# EAGLE board 13336_esp32-thing-panel.v10 (EAGLE 7.5.0), part 1 of 10
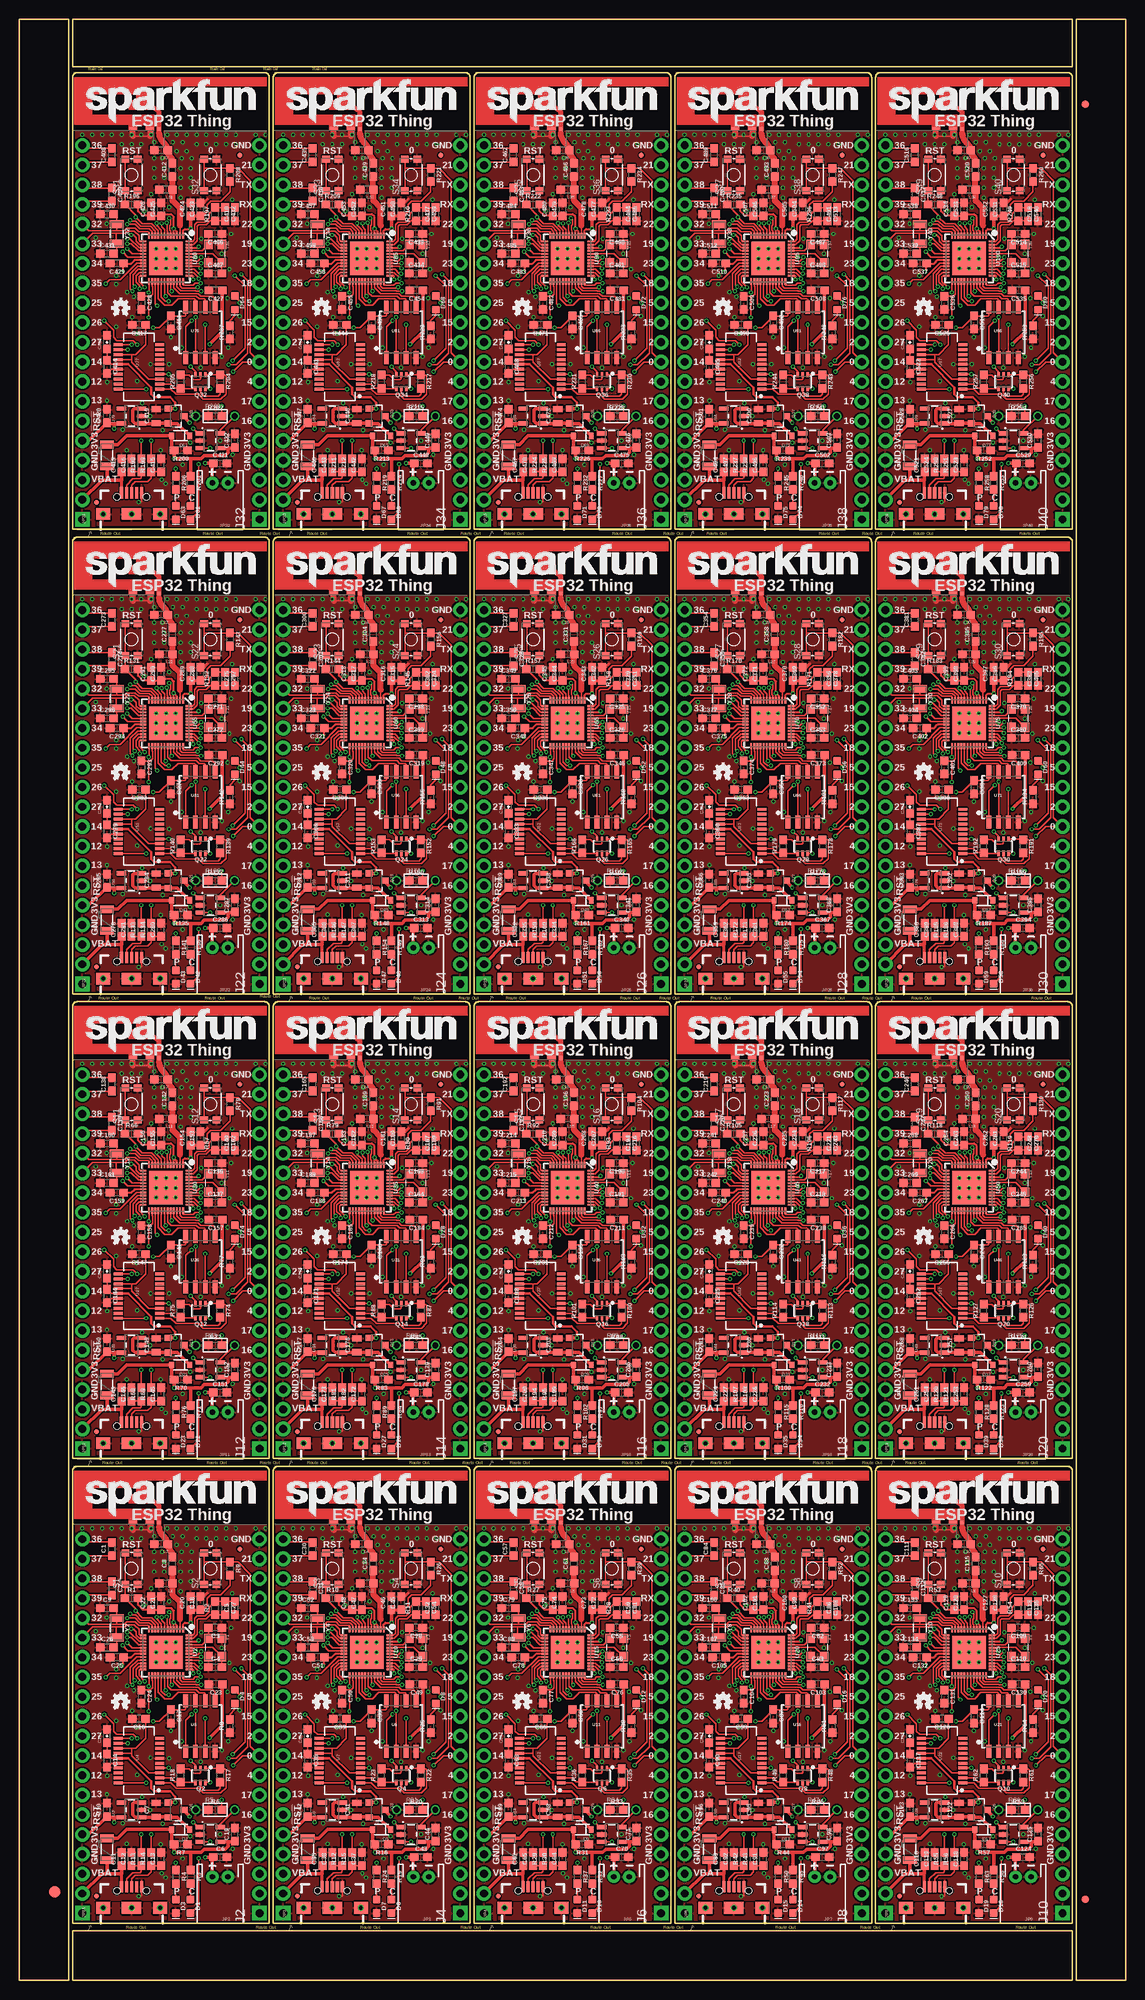
[diagram p0: board, top side]
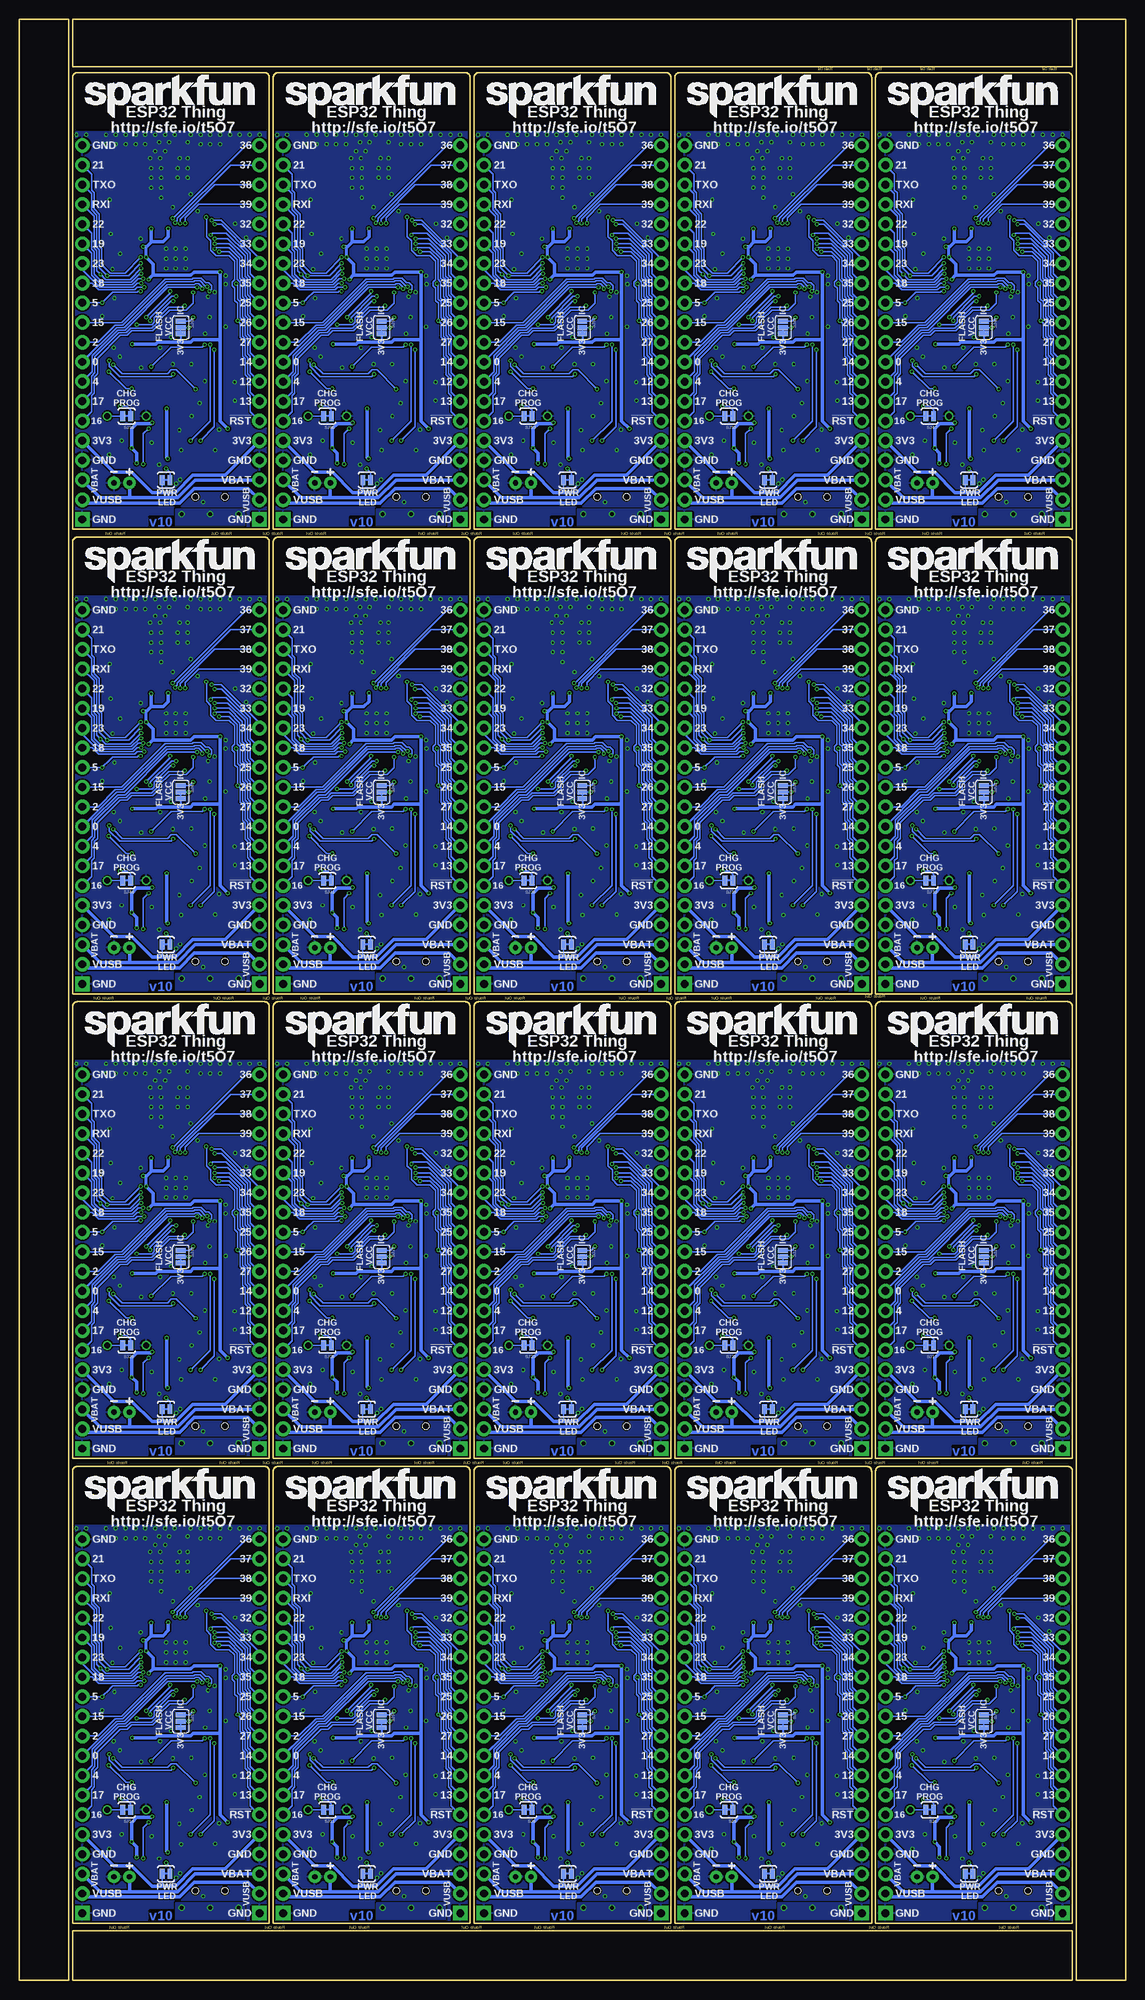
[diagram p1: board, bottom side, seen from below]

Size 142.75 x 252.98 mm. Coordinates in mm from the lower left corner, seen from the top.
Outline: 6.35,79.76 6.35,0 0,0 0,30.23
Outline: 0,27.69 0,252.98 6.35,252.98 6.35,77.22
Outline: 79.25,0 6.86,0 6.86,6.35 29.72,6.35
Outline: 27.18,6.35 135.89,6.35 135.89,0 76.71,0
Outline: 63.5,252.98 135.89,252.98 135.89,246.89 6.86,246.89 6.86,252.98 66.04,252.98
Outline: 136.4,173.74 136.4,252.98 142.75,252.98 142.75,223.27
Outline: 142.75,225.81 142.75,0 136.4,0 136.4,176.28
Outline: 6.86,7.37 6.86,65.66 arc-90 7.49,66.29 31.62,66.29 arc-90 32.26,65.66 32.26,7.37 6.86,7.37
Outline: 32.77,7.37 32.77,65.66 arc-90 33.4,66.29 57.53,66.29 arc-90 58.17,65.66 58.17,7.37 32.77,7.37
Outline: 58.67,7.37 58.67,65.66 arc-90 59.31,66.29 83.44,66.29 arc-90 84.07,65.66 84.07,7.37 58.67,7.37
Outline: 84.58,7.37 84.58,65.66 arc-90 85.22,66.29 109.35,66.29 arc-90 109.98,65.66 109.98,7.37 84.58,7.37
Outline: 110.49,7.37 110.49,65.66 arc-90 111.12,66.29 135.25,66.29 arc-90 135.89,65.66 135.89,7.37 110.49,7.37
Outline: 6.86,67.31 6.86,125.6 arc-90 7.49,126.24 31.62,126.24 arc-90 32.26,125.6 32.26,67.31 6.86,67.31
Outline: 32.77,67.31 32.77,125.6 arc-90 33.4,126.24 57.53,126.24 arc-90 58.17,125.6 58.17,67.31 32.77,67.31
Outline: 58.67,67.31 58.67,125.6 arc-90 59.31,126.24 83.44,126.24 arc-90 84.07,125.6 84.07,67.31 58.67,67.31
Outline: 84.58,67.31 84.58,125.6 arc-90 85.22,126.24 109.35,126.24 arc-90 109.98,125.6 109.98,67.31 84.58,67.31
Outline: 110.49,67.31 110.49,125.6 arc-90 111.12,126.24 135.25,126.24 arc-90 135.89,125.6 135.89,67.31 110.49,67.31
Outline: 6.86,127.25 6.86,185.55 arc-90 7.49,186.18 31.62,186.18 arc-90 32.26,185.55 32.26,127.25 6.86,127.25
Outline: 32.77,127.25 32.77,185.55 arc-90 33.4,186.18 57.53,186.18 arc-90 58.17,185.55 58.17,127.25 32.77,127.25
Outline: 58.67,127.25 58.67,185.55 arc-90 59.31,186.18 83.44,186.18 arc-90 84.07,185.55 84.07,127.25 58.67,127.25
Outline: 84.58,127.25 84.58,185.55 arc-90 85.22,186.18 109.35,186.18 arc-90 109.98,185.55 109.98,127.25 84.58,127.25
Outline: 110.49,127.25 110.49,185.55 arc-90 111.12,186.18 135.25,186.18 arc-90 135.89,185.55 135.89,127.25 110.49,127.25
Outline: 6.86,187.2 6.86,245.49 arc-90 7.49,246.13 31.62,246.13 arc-90 32.26,245.49 32.26,187.2 6.86,187.2
Outline: 32.77,187.2 32.77,245.49 arc-90 33.4,246.13 57.53,246.13 arc-90 58.17,245.49 58.17,187.2 32.77,187.2
Outline: 58.67,187.2 58.67,245.49 arc-90 59.31,246.13 83.44,246.13 arc-90 84.07,245.49 84.07,187.2 58.67,187.2
Outline: 84.58,187.2 84.58,245.49 arc-90 85.22,246.13 109.35,246.13 arc-90 109.98,245.49 109.98,187.2 84.58,187.2
Outline: 110.49,187.2 110.49,245.49 arc-90 111.12,246.13 135.25,246.13 arc-90 135.89,245.49 135.89,187.2 110.49,187.2
Copper layers (1*16): Top 0.035mm / dielectric 1.5mm / Bottom 0.035mm
Design rules "SparkFun-2-layer-FAB-LIMIT *": minimum track width 6mil, minimum drill 6mil, track to track 6mil, track to pad 6mil, pad to pad 6mil, via to via 6mil, smd to smd 6mil, copper to edge 4mil, drill to drill 4mil, minimum pad ring 5mil, minimum via ring 5mil, stop-mask expansion 4mil, vias tented up to drill 25mil, thermal gap 10mil

## Footprints (pad centres in the part's own frame; a part is rotated, then mirrored left to right if it is on the bottom)
0603 = smd 1.1 x 1: 1 -0.85,0; 2 0.85,0
0805 = smd 0.8 x 1.2: 1 -0.9,0; 2 0.9,0
0603-CAP = smd 1.1 x 1: 1 -0.85,0; 2 0.85,0
LED-0603 = smd 1 x 1: A 0,-0.877; C 0,0.877
SOD-323 = smd 0.63 x 0.83: A 1.15,0; C -1.15,0
TRACE_ANTENNA_2.4GHZ_25.7MM_TUNED = smd 0.46 x 0.46: ANT 0,0.23 | smd 1 x 0.46: GND -1.18,0.23; GND2 -3.38,0.23
FIDUCIAL-1.5X3 = smd 1.5 x 1.5: 1 0,0
FIDUCIAL-1X2 = smd 1 x 1: 1 0,0
PTC-1206 = smd 1 x 1.8: 1 -1.4,0; 2 1.4,0
MICRO-FIDUCIAL = smd 0.635 x 0.635: 1 0,0
1X20_NOSILK = drill 1.016 pad 1.88 square: 1 0,0 | drill 1.016 pad 1.88: 2 2.54,0; 3 5.08,0; 4 7.62,0; 5 10.16,0; 6 12.7,0; 7 15.24,0; 8 17.78,0; 9 20.32,0; 10 22.86,0; 11 25.4,0; 12 27.94,0; 13 30.48,0; 14 33.02,0; 15 35.56,0; 16 38.1,0; 17 40.64,0; 18 43.18,0; 19 45.72,0; 20 48.26,0
USB-B-MICRO-SMD_V03 = smd 1.45 x 0.4: D+ 2.725,0; D- 2.725,0.65; GND 2.725,-1.3; ID 2.725,-0.65; VBUS 2.725,1.3 | smd 1.5 x 1.8: SHIELD1 0,3.685; SHIELD2 0,-3.685 | smd 1.5 x 2.5: SHIELD3 0,0 | hole 0.85: 2.2,1.9; 2.2,-1.9
JST-2-PTH = drill 0.7 pad 1.6: 1 -1,0; 2 1,0
SOT23-3 = smd 0.8 x 0.9: 1 -0.95,-1; 2 0.95,-1; 3 0,1.1
SC70-6 = smd 0.3 x 0.66: 1 -0.65,-0.92; 2 0,-0.92; 3 0.65,-0.92; 4 0.65,0.92; 5 0,0.92; 6 -0.65,0.92
1/6W-RES = drill 0.762: 1 -2.5,0; 2 2.5,0
TACTILE_SWITCH_SMD_4.6X2.8MM = smd 0.9 x 1: 1 -2.05,-0.8; 2 2.05,-0.8; 3 2.05,0.8; 4 -2.05,0.8
PAD-JUMPER-2-NC_BY_TRACE_YES_SILK = smd 0.635 x 1.27: 1 -0.508,0; 2 0.508,0
PAD-JUMPER-3-2OF3_NC_BY_TRACE_YES_SILK_FULL_BOX = smd 0.635 x 1.27: 1 -0.813,0; 2 0,0; 3 0.813,0
SOT23-5 = smd 0.55 x 1.2: 1 -0.95,-1.3; 2 0,-1.3; 3 0.95,-1.3; 4 0.95,1.3; 5 -0.95,1.3
QFN48-0.4MM = smd 0.8 x 0.23: 1 -2.95,2.2; 2 -2.95,1.8; 3 -2.95,1.4; 4 -2.95,1; 5 -2.95,0.6; 6 -2.95,0.2; 7 -2.95,-0.2; 8 -2.95,-0.6; 9 -2.95,-1; 10 -2.95,-1.4; 11 -2.95,-1.8; 12 -2.95,-2.2; 25 2.95,-2.2; 26 2.95,-1.8; 27 2.95,-1.4; 28 2.95,-1; 29 2.95,-0.6; 30 2.95,-0.2; 31 2.95,0.2; 32 2.95,0.6; 33 2.95,1; 34 2.95,1.4; 35 2.95,1.8; 36 2.95,2.2 | smd 0.23 x 0.8: 13 -2.2,-2.95; 14 -1.8,-2.95; 15 -1.4,-2.95; 16 -1,-2.95; 17 -0.6,-2.95; 18 -0.2,-2.95; 19 0.2,-2.95; 20 0.6,-2.95; 21 1,-2.95; 22 1.4,-2.95; 23 1.8,-2.95; 24 2.2,-2.95; 37 2.2,2.95; 38 1.8,2.95; 39 1.4,2.95; 40 1,2.95; 41 0.6,2.95; 42 0.2,2.95; 43 -0.2,2.95; 44 -0.6,2.95; 45 -1,2.95; 46 -1.4,2.95; 47 -1.8,2.95; 48 -2.2,2.95 | smd 4.3 x 4.3: EP 0,0
SSOP20_L = smd 0.381 x 1.143: 1 -2.857,-2.68; 2 -2.223,-2.68; 3 -1.587,-2.68; 4 -0.953,-2.68; 5 -0.318,-2.68; 6 0.318,-2.68; 7 0.953,-2.68; 8 1.587,-2.68; 9 2.223,-2.68; 10 2.857,-2.68; 11 2.857,2.68; 12 2.223,2.68; 13 1.587,2.68; 14 0.953,2.68; 15 0.318,2.68; 16 -0.318,2.68; 17 -0.953,2.68; 18 -1.587,2.68; 19 -2.223,2.68; 20 -2.857,2.68
SOIC-8 = smd 0.61 x 1.702: 1 -1.905,-3.251; 2 -0.635,-3.251; 3 0.635,-3.251; 4 1.905,-3.251; 5 1.905,3.251; 6 0.635,3.251; 7 -0.635,3.251; 8 -1.905,3.251
CRYSTAL-SMD-3.2X2.5 = smd 1.2 x 1.1: 1 -1.175,-0.875; 2 1.175,-0.875; 3 1.175,0.875; 4 -1.175,0.875
CRYSTAL-SMD-3.2X1.5MM = smd 1 x 1.8: P$1 -1.25,0; P$2 1.25,0

## Placement (x,y rotation side)
C1  270pF  [0603]  11.94,55.63 90 top
C2  270pF  [0603]  11.94,50.55 270 top
C3  10pF  [0603]  25.27,45.47 180 top
C4  10pF  [0603]  25.27,40.39 0 top
C5  10nF  [0603]  27.81,48.01 90 top
C6  4.7uF  [0603]  25.91,15.88 0 top
C7  1.0uF  [0805]  17.65,21.97 90 top
C8  5.6pF  [0603]  19.76,53.72 90 top
C9  15pF  [0603]  11.3,48.01 0 top
C10  2.2uF  [0603]  11.3,21.97 90 top
C11  0.1uF  [0603]  13.21,15.62 90 top
C12  47pF  [0603]  14.48,15.62 90 top
C13  47pF  [0603]  18.29,15.62 90 top
C14  0.1uF  [0603]  11.3,28.32 270 top
C15  4.7uF  [0603-CAP]  11.3,31.5 90 top
C16  0.1uF  [0603]  15.43,33.72 180 top
C17  0.1uF  [0603]  19.56,34.04 270 top
C18  100pF  [0603]  23.37,48.64 90 top
C19  4.7uF  [0603]  27.81,18.8 90 top
C20  0.1uF  [0603]  22.1,48.64 90 top
C21  0.1uF  [0603]  18.29,48.64 90 top
C22  10uF  [0603]  17.02,48.64 90 top
C23  0.1uF  [0603]  25.32,38.18 180 top
C24  1.0uF  [0603]  15.75,36.58 270 top
C25  0.1uF  [0603]  12.57,41.66 180 top
C26  15pF  [0603]  11.3,42.93 0 top
C27  3.0nF  [0603]  26.54,48.01 270 top
C28  10pF  [0603]  51.18,45.47 180 top
C29  10pF  [0603]  51.18,40.39 0 top
C30  270pF  [0603]  37.85,55.63 90 top
C31  270pF  [0603]  37.85,50.55 270 top
C32  10nF  [0603]  53.72,48.01 90 top
C33  0.1uF  [0603]  45.47,34.04 270 top
C34  5.6pF  [0603]  45.67,53.72 90 top
C35  0.1uF  [0603]  39.12,15.62 90 top
C36  0.1uF  [0603]  37.21,28.32 270 top
C37  47pF  [0603]  44.2,15.62 90 top
C38  47pF  [0603]  40.39,15.62 90 top
C39  0.1uF  [0603]  41.34,33.72 180 top
C40  4.7uF  [0603-CAP]  37.21,31.5 90 top
C41  1.0uF  [0805]  43.56,21.97 90 top
C42  2.2uF  [0603]  37.21,21.97 90 top
C43  4.7uF  [0603]  51.82,15.88 0 top
C44  4.7uF  [0603]  53.72,18.8 90 top
C45  100pF  [0603]  49.28,48.64 90 top
C46  0.1uF  [0603]  48.01,48.64 90 top
C47  0.1uF  [0603]  44.2,48.64 90 top
C48  10uF  [0603]  42.93,48.64 90 top
C49  0.1uF  [0603]  51.23,38.18 180 top
C50  1.0uF  [0603]  41.66,36.58 270 top
C51  0.1uF  [0603]  38.48,41.66 180 top
C52  15pF  [0603]  37.21,48.01 0 top
C53  15pF  [0603]  37.21,42.93 0 top
C54  3.0nF  [0603]  52.45,48.01 270 top
C55  10pF  [0603]  77.09,45.47 180 top
C56  10pF  [0603]  77.09,40.39 0 top
C57  270pF  [0603]  63.75,55.63 90 top
C58  270pF  [0603]  63.75,50.55 270 top
C59  10nF  [0603]  79.63,48.01 90 top
C60  0.1uF  [0603]  71.37,34.04 270 top
C61  5.6pF  [0603]  71.58,53.72 90 top
C62  0.1uF  [0603]  65.02,15.62 90 top
C63  0.1uF  [0603]  63.12,28.32 270 top
C64  47pF  [0603]  70.1,15.62 90 top
C65  47pF  [0603]  66.29,15.62 90 top
C66  0.1uF  [0603]  67.25,33.72 180 top
C67  4.7uF  [0603-CAP]  63.12,31.5 90 top
C68  1.0uF  [0805]  69.47,21.97 90 top
C69  2.2uF  [0603]  63.12,21.97 90 top
C70  4.7uF  [0603]  77.72,15.88 0 top
C71  4.7uF  [0603]  79.63,18.8 90 top
C72  100pF  [0603]  75.18,48.64 90 top
C73  0.1uF  [0603]  73.91,48.64 90 top
C74  0.1uF  [0603]  70.1,48.64 90 top
C75  10uF  [0603]  68.83,48.64 90 top
C76  0.1uF  [0603]  77.14,38.18 180 top
C77  1.0uF  [0603]  67.56,36.58 270 top
C78  0.1uF  [0603]  64.39,41.66 180 top
C79  15pF  [0603]  63.12,48.01 0 top
C80  15pF  [0603]  63.12,42.93 0 top
C81  3.0nF  [0603]  78.36,48.01 270 top
C82  10pF  [0603]  103,45.47 180 top
C83  10pF  [0603]  103,40.39 0 top
C84  270pF  [0603]  89.66,55.63 90 top
C85  270pF  [0603]  89.66,50.55 270 top
C86  10nF  [0603]  105.54,48.01 90 top
C87  0.1uF  [0603]  97.28,34.04 270 top
C88  5.6pF  [0603]  97.49,53.72 90 top
C89  0.1uF  [0603]  90.93,15.62 90 top
C90  0.1uF  [0603]  89.03,28.32 270 top
C91  47pF  [0603]  96.01,15.62 90 top
C92  47pF  [0603]  92.2,15.62 90 top
C93  0.1uF  [0603]  93.15,33.72 180 top
C94  4.7uF  [0603-CAP]  89.03,31.5 90 top
C95  1.0uF  [0805]  95.38,21.97 90 top
C96  2.2uF  [0603]  89.03,21.97 90 top
C97  4.7uF  [0603]  103.63,15.88 0 top
C98  4.7uF  [0603]  105.54,18.8 90 top
C99  100pF  [0603]  101.09,48.64 90 top
C100  0.1uF  [0603]  99.82,48.64 90 top
C101  0.1uF  [0603]  96.01,48.64 90 top
C102  10uF  [0603]  94.74,48.64 90 top
C103  0.1uF  [0603]  103.05,38.18 180 top
C104  1.0uF  [0603]  93.47,36.58 270 top
C105  0.1uF  [0603]  90.3,41.66 180 top
C106  15pF  [0603]  89.03,48.01 0 top
C107  15pF  [0603]  89.03,42.93 0 top
C108  3.0nF  [0603]  104.27,48.01 270 top
C109  10pF  [0603]  128.91,45.47 180 top
C110  10pF  [0603]  128.91,40.39 0 top
C111  270pF  [0603]  115.57,55.63 90 top
C112  270pF  [0603]  115.57,50.55 270 top
C113  10nF  [0603]  131.44,48.01 90 top
C114  0.1uF  [0603]  123.19,34.04 270 top
C115  5.6pF  [0603]  123.39,53.72 90 top
C116  0.1uF  [0603]  116.84,15.62 90 top
C117  0.1uF  [0603]  114.94,28.32 270 top
C118  47pF  [0603]  121.92,15.62 90 top
C119  47pF  [0603]  118.11,15.62 90 top
C120  0.1uF  [0603]  119.06,33.72 180 top
C121  4.7uF  [0603-CAP]  114.94,31.5 90 top
C122  1.0uF  [0805]  121.29,21.97 90 top
C123  2.2uF  [0603]  114.94,21.97 90 top
C124  4.7uF  [0603]  129.54,15.88 0 top
C125  4.7uF  [0603]  131.44,18.8 90 top
C126  100pF  [0603]  127,48.64 90 top
C127  0.1uF  [0603]  125.73,48.64 90 top
C128  0.1uF  [0603]  121.92,48.64 90 top
C129  10uF  [0603]  120.65,48.64 90 top
C130  0.1uF  [0603]  128.96,38.18 180 top
C131  1.0uF  [0603]  119.38,36.58 270 top
C132  0.1uF  [0603]  116.2,41.66 180 top
C133  15pF  [0603]  114.94,48.01 0 top
C134  15pF  [0603]  114.94,42.93 0 top
C135  3.0nF  [0603]  130.17,48.01 270 top
C136  10pF  [0603]  25.27,105.41 180 top
C137  10pF  [0603]  25.27,100.33 0 top
C138  270pF  [0603]  11.94,115.57 90 top
C139  270pF  [0603]  11.94,110.49 270 top
C140  10nF  [0603]  27.81,107.95 90 top
C141  0.1uF  [0603]  19.56,93.98 270 top
C142  5.6pF  [0603]  19.76,113.67 90 top
C143  0.1uF  [0603]  13.21,75.56 90 top
C144  0.1uF  [0603]  11.3,88.27 270 top
C145  47pF  [0603]  18.29,75.56 90 top
C146  47pF  [0603]  14.48,75.56 90 top
C147  0.1uF  [0603]  15.43,93.66 180 top
C148  4.7uF  [0603-CAP]  11.3,91.44 90 top
C149  1.0uF  [0805]  17.65,81.92 90 top
C150  2.2uF  [0603]  11.3,81.92 90 top
C151  4.7uF  [0603]  25.91,75.82 0 top
C152  4.7uF  [0603]  27.81,78.74 90 top
C153  100pF  [0603]  23.37,108.58 90 top
C154  0.1uF  [0603]  22.1,108.58 90 top
C155  0.1uF  [0603]  18.29,108.58 90 top
C156  10uF  [0603]  17.02,108.58 90 top
C157  0.1uF  [0603]  25.32,98.12 180 top
C158  1.0uF  [0603]  15.75,96.52 270 top
C159  0.1uF  [0603]  12.57,101.6 180 top
C160  15pF  [0603]  11.3,107.95 0 top
C161  15pF  [0603]  11.3,102.87 0 top
C162  3.0nF  [0603]  26.54,107.95 270 top
C163  10pF  [0603]  51.18,105.41 180 top
C164  10pF  [0603]  51.18,100.33 0 top
C165  270pF  [0603]  37.85,115.57 90 top
C166  270pF  [0603]  37.85,110.49 270 top
C167  10nF  [0603]  53.72,107.95 90 top
C168  0.1uF  [0603]  45.47,93.98 270 top
C169  5.6pF  [0603]  45.67,113.67 90 top
C170  0.1uF  [0603]  39.12,75.56 90 top
C171  0.1uF  [0603]  37.21,88.27 270 top
C172  47pF  [0603]  44.2,75.56 90 top
C173  47pF  [0603]  40.39,75.56 90 top
C174  0.1uF  [0603]  41.34,93.66 180 top
C175  4.7uF  [0603-CAP]  37.21,91.44 90 top
C176  1.0uF  [0805]  43.56,81.92 90 top
C177  2.2uF  [0603]  37.21,81.92 90 top
C178  4.7uF  [0603]  51.82,75.82 0 top
C179  4.7uF  [0603]  53.72,78.74 90 top
C180  100pF  [0603]  49.28,108.58 90 top
C181  0.1uF  [0603]  48.01,108.58 90 top
C182  0.1uF  [0603]  44.2,108.58 90 top
C183  10uF  [0603]  42.93,108.58 90 top
C184  0.1uF  [0603]  51.23,98.12 180 top
C185  1.0uF  [0603]  41.66,96.52 270 top
C186  0.1uF  [0603]  38.48,101.6 180 top
C187  15pF  [0603]  37.21,107.95 0 top
C188  15pF  [0603]  37.21,102.87 0 top
C189  3.0nF  [0603]  52.45,107.95 270 top
C190  10pF  [0603]  77.09,105.41 180 top
C191  10pF  [0603]  77.09,100.33 0 top
C192  270pF  [0603]  63.75,115.57 90 top
C193  270pF  [0603]  63.75,110.49 270 top
C194  10nF  [0603]  79.63,107.95 90 top
C195  0.1uF  [0603]  71.37,93.98 270 top
C196  5.6pF  [0603]  71.58,113.67 90 top
C197  0.1uF  [0603]  65.02,75.56 90 top
C198  0.1uF  [0603]  63.12,88.27 270 top
C199  47pF  [0603]  70.1,75.56 90 top
C200  47pF  [0603]  66.29,75.56 90 top
C201  0.1uF  [0603]  67.25,93.66 180 top
C202  4.7uF  [0603-CAP]  63.12,91.44 90 top
C203  1.0uF  [0805]  69.47,81.92 90 top
C204  2.2uF  [0603]  63.12,81.92 90 top
C205  4.7uF  [0603]  77.72,75.82 0 top
C206  4.7uF  [0603]  79.63,78.74 90 top
C207  100pF  [0603]  75.18,108.58 90 top
C208  0.1uF  [0603]  73.91,108.58 90 top
C209  0.1uF  [0603]  70.1,108.58 90 top
C210  10uF  [0603]  68.83,108.58 90 top
C211  0.1uF  [0603]  77.14,98.12 180 top
C212  1.0uF  [0603]  67.56,96.52 270 top
C213  0.1uF  [0603]  64.39,101.6 180 top
C214  15pF  [0603]  63.12,107.95 0 top
C215  15pF  [0603]  63.12,102.87 0 top
C216  3.0nF  [0603]  78.36,107.95 270 top
C217  10pF  [0603]  103,105.41 180 top
C218  10pF  [0603]  103,100.33 0 top
C219  270pF  [0603]  89.66,115.57 90 top
C220  270pF  [0603]  89.66,110.49 270 top
C221  10nF  [0603]  105.54,107.95 90 top
C222  0.1uF  [0603]  97.28,93.98 270 top
C223  5.6pF  [0603]  97.49,113.67 90 top
C224  0.1uF  [0603]  90.93,75.56 90 top
C225  0.1uF  [0603]  89.03,88.27 270 top
C226  47pF  [0603]  96.01,75.56 90 top
C227  47pF  [0603]  92.2,75.56 90 top
C228  0.1uF  [0603]  93.15,93.66 180 top
C229  4.7uF  [0603-CAP]  89.03,91.44 90 top
C230  1.0uF  [0805]  95.38,81.92 90 top
C231  2.2uF  [0603]  89.03,81.92 90 top
C232  4.7uF  [0603]  103.63,75.82 0 top
C233  4.7uF  [0603]  105.54,78.74 90 top
C234  100pF  [0603]  101.09,108.58 90 top
C235  0.1uF  [0603]  99.82,108.58 90 top
C236  0.1uF  [0603]  96.01,108.58 90 top
C237  10uF  [0603]  94.74,108.58 90 top
C238  0.1uF  [0603]  103.05,98.12 180 top
C239  1.0uF  [0603]  93.47,96.52 270 top
C240  0.1uF  [0603]  90.3,101.6 180 top
C241  15pF  [0603]  89.03,107.95 0 top
C242  15pF  [0603]  89.03,102.87 0 top
C243  3.0nF  [0603]  104.27,107.95 270 top
C244  10pF  [0603]  128.91,105.41 180 top
C245  10pF  [0603]  128.91,100.33 0 top
C246  270pF  [0603]  115.57,115.57 90 top
C247  270pF  [0603]  115.57,110.49 270 top
C248  10nF  [0603]  131.44,107.95 90 top
C249  0.1uF  [0603]  123.19,93.98 270 top
C250  5.6pF  [0603]  123.39,113.67 90 top
C251  0.1uF  [0603]  116.84,75.56 90 top
C252  0.1uF  [0603]  114.94,88.27 270 top
C253  47pF  [0603]  121.92,75.56 90 top
C254  47pF  [0603]  118.11,75.56 90 top
C255  0.1uF  [0603]  119.06,93.66 180 top
C256  4.7uF  [0603-CAP]  114.94,91.44 90 top
C257  1.0uF  [0805]  121.29,81.92 90 top
C258  2.2uF  [0603]  114.94,81.92 90 top
C259  4.7uF  [0603]  129.54,75.82 0 top
C260  4.7uF  [0603]  131.44,78.74 90 top
C261  100pF  [0603]  127,108.58 90 top
C262  0.1uF  [0603]  125.73,108.58 90 top
C263  0.1uF  [0603]  121.92,108.58 90 top
C264  10uF  [0603]  120.65,108.58 90 top
C265  0.1uF  [0603]  128.96,98.12 180 top
C266  1.0uF  [0603]  119.38,96.52 270 top
C267  0.1uF  [0603]  116.2,101.6 180 top
C268  15pF  [0603]  114.94,107.95 0 top
C269  15pF  [0603]  114.94,102.87 0 top
C270  3.0nF  [0603]  130.17,107.95 270 top
C271  10pF  [0603]  25.27,165.35 180 top
C272  10pF  [0603]  25.27,160.27 0 top
C273  270pF  [0603]  11.94,175.51 90 top
C274  270pF  [0603]  11.94,170.43 270 top
C275  10nF  [0603]  27.81,167.89 90 top
C276  0.1uF  [0603]  19.56,153.92 270 top
C277  5.6pF  [0603]  19.76,173.61 90 top
C278  0.1uF  [0603]  13.21,135.51 90 top
C279  0.1uF  [0603]  11.3,148.21 270 top
C280  47pF  [0603]  18.29,135.51 90 top
C281  47pF  [0603]  14.48,135.51 90 top
C282  0.1uF  [0603]  15.43,153.61 180 top
C283  4.7uF  [0603-CAP]  11.3,151.38 90 top
C284  1.0uF  [0805]  17.65,141.86 90 top
C285  2.2uF  [0603]  11.3,141.86 90 top
C286  4.7uF  [0603]  25.91,135.76 0 top
C287  4.7uF  [0603]  27.81,138.68 90 top
C288  100pF  [0603]  23.37,168.53 90 top
C289  0.1uF  [0603]  22.1,168.53 90 top
C290  0.1uF  [0603]  18.29,168.53 90 top
C291  10uF  [0603]  17.02,168.53 90 top
C292  0.1uF  [0603]  25.32,158.06 180 top
C293  1.0uF  [0603]  15.75,156.46 270 top
C294  0.1uF  [0603]  12.57,161.54 180 top
C295  15pF  [0603]  11.3,167.89 0 top
C296  15pF  [0603]  11.3,162.81 0 top
C297  3.0nF  [0603]  26.54,167.89 270 top
C298  10pF  [0603]  51.18,165.35 180 top
C299  10pF  [0603]  51.18,160.27 0 top
C300  270pF  [0603]  37.85,175.51 90 top
C301  270pF  [0603]  37.85,170.43 270 top
C302  10nF  [0603]  53.72,167.89 90 top
C303  0.1uF  [0603]  45.47,153.92 270 top
C304  5.6pF  [0603]  45.67,173.61 90 top
C305  0.1uF  [0603]  39.12,135.51 90 top
C306  0.1uF  [0603]  37.21,148.21 270 top
C307  47pF  [0603]  44.2,135.51 90 top
C308  47pF  [0603]  40.39,135.51 90 top
C309  0.1uF  [0603]  41.34,153.61 180 top
C310  4.7uF  [0603-CAP]  37.21,151.38 90 top
C311  1.0uF  [0805]  43.56,141.86 90 top
C312  2.2uF  [0603]  37.21,141.86 90 top
C313  4.7uF  [0603]  51.82,135.76 0 top
C314  4.7uF  [0603]  53.72,138.68 90 top
C315  100pF  [0603]  49.28,168.53 90 top
C316  0.1uF  [0603]  48.01,168.53 90 top
C317  0.1uF  [0603]  44.2,168.53 90 top
C318  10uF  [0603]  42.93,168.53 90 top
C319  0.1uF  [0603]  51.23,158.06 180 top
C320  1.0uF  [0603]  41.66,156.46 270 top
C321  0.1uF  [0603]  38.48,161.54 180 top
C322  15pF  [0603]  37.21,167.89 0 top
C323  15pF  [0603]  37.21,162.81 0 top
C324  3.0nF  [0603]  52.45,167.89 270 top
C325  10pF  [0603]  77.09,165.35 180 top
C326  10pF  [0603]  77.09,160.27 0 top
C327  270pF  [0603]  63.75,175.51 90 top
C328  270pF  [0603]  63.75,170.43 270 top
C329  10nF  [0603]  79.63,167.89 90 top
C330  0.1uF  [0603]  71.37,153.92 270 top
C331  5.6pF  [0603]  71.58,173.61 90 top
C332  0.1uF  [0603]  65.02,135.51 90 top
C333  0.1uF  [0603]  63.12,148.21 270 top
C334  47pF  [0603]  70.1,135.51 90 top
C335  47pF  [0603]  66.29,135.51 90 top
C336  0.1uF  [0603]  67.25,153.61 180 top
C337  4.7uF  [0603-CAP]  63.12,151.38 90 top
C338  1.0uF  [0805]  69.47,141.86 90 top
C339  2.2uF  [0603]  63.12,141.86 90 top
C340  4.7uF  [0603]  77.72,135.76 0 top
C341  4.7uF  [0603]  79.63,138.68 90 top
C342  100pF  [0603]  75.18,168.53 90 top
C343  0.1uF  [0603]  73.91,168.53 90 top
C344  0.1uF  [0603]  70.1,168.53 90 top
C345  10uF  [0603]  68.83,168.53 90 top
C346  0.1uF  [0603]  77.14,158.06 180 top
C347  1.0uF  [0603]  67.56,156.46 270 top
C348  0.1uF  [0603]  64.39,161.54 180 top
C349  15pF  [0603]  63.12,167.89 0 top
C350  15pF  [0603]  63.12,162.81 0 top
C351  3.0nF  [0603]  78.36,167.89 270 top
C352  10pF  [0603]  103,165.35 180 top
C353  10pF  [0603]  103,160.27 0 top
C354  270pF  [0603]  89.66,175.51 90 top
C355  270pF  [0603]  89.66,170.43 270 top
C356  10nF  [0603]  105.54,167.89 90 top
C357  0.1uF  [0603]  97.28,153.92 270 top
C358  5.6pF  [0603]  97.49,173.61 90 top
C359  0.1uF  [0603]  90.93,135.51 90 top
C360  0.1uF  [0603]  89.03,148.21 270 top
C361  47pF  [0603]  96.01,135.51 90 top
C362  47pF  [0603]  92.2,135.51 90 top
C363  0.1uF  [0603]  93.15,153.61 180 top
C364  4.7uF  [0603-CAP]  89.03,151.38 90 top
C365  1.0uF  [0805]  95.38,141.86 90 top
C366  2.2uF  [0603]  89.03,141.86 90 top
C367  4.7uF  [0603]  103.63,135.76 0 top
C368  4.7uF  [0603]  105.54,138.68 90 top
C369  100pF  [0603]  101.09,168.53 90 top
C370  0.1uF  [0603]  99.82,168.53 90 top
C371  0.1uF  [0603]  96.01,168.53 90 top
C372  10uF  [0603]  94.74,168.53 90 top
C373  0.1uF  [0603]  103.05,158.06 180 top
C374  1.0uF  [0603]  93.47,156.46 270 top
C375  0.1uF  [0603]  90.3,161.54 180 top
C376  15pF  [0603]  89.03,167.89 0 top
C377  15pF  [0603]  89.03,162.81 0 top
C378  3.0nF  [0603]  104.27,167.89 270 top
C379  10pF  [0603]  128.91,165.35 180 top
C380  10pF  [0603]  128.91,160.27 0 top
C381  270pF  [0603]  115.57,175.51 90 top
C382  270pF  [0603]  115.57,170.43 270 top
C383  10nF  [0603]  131.44,167.89 90 top
C384  0.1uF  [0603]  123.19,153.92 270 top
C385  5.6pF  [0603]  123.39,173.61 90 top
C386  0.1uF  [0603]  116.84,135.51 90 top
C387  0.1uF  [0603]  114.94,148.21 270 top
C388  47pF  [0603]  121.92,135.51 90 top
C389  47pF  [0603]  118.11,135.51 90 top
C390  0.1uF  [0603]  119.06,153.61 180 top
C391  4.7uF  [0603-CAP]  114.94,151.38 90 top
C392  1.0uF  [0805]  121.29,141.86 90 top
C393  2.2uF  [0603]  114.94,141.86 90 top
C394  4.7uF  [0603]  129.54,135.76 0 top
C395  4.7uF  [0603]  131.44,138.68 90 top
C396  100pF  [0603]  127,168.53 90 top
C397  0.1uF  [0603]  125.73,168.53 90 top
C398  0.1uF  [0603]  121.92,168.53 90 top
C399  10uF  [0603]  120.65,168.53 90 top
C400  0.1uF  [0603]  128.96,158.06 180 top
C401  1.0uF  [0603]  119.38,156.46 270 top
C402  0.1uF  [0603]  116.2,161.54 180 top
C403  15pF  [0603]  114.94,167.89 0 top
C404  15pF  [0603]  114.94,162.81 0 top
C405  3.0nF  [0603]  130.17,167.89 270 top
C406  10pF  [0603]  25.27,225.3 180 top
C407  10pF  [0603]  25.27,220.22 0 top
C408  270pF  [0603]  11.94,235.46 90 top
C409  270pF  [0603]  11.94,230.38 270 top
C410  10nF  [0603]  27.81,227.84 90 top
C411  0.1uF  [0603]  19.56,213.87 270 top
C412  5.6pF  [0603]  19.76,233.55 90 top
C413  0.1uF  [0603]  13.21,195.45 90 top
C414  0.1uF  [0603]  11.3,208.15 270 top
C415  47pF  [0603]  18.29,195.45 90 top
C416  47pF  [0603]  14.48,195.45 90 top
C417  0.1uF  [0603]  15.43,213.55 180 top
C418  4.7uF  [0603-CAP]  11.3,211.33 90 top
C419  1.0uF  [0805]  17.65,201.8 90 top
C420  2.2uF  [0603]  11.3,201.8 90 top
C421  4.7uF  [0603]  25.91,195.71 0 top
C422  4.7uF  [0603]  27.81,198.63 90 top
C423  100pF  [0603]  23.37,228.47 90 top
C424  0.1uF  [0603]  22.1,228.47 90 top
C425  0.1uF  [0603]  18.29,228.47 90 top
C426  10uF  [0603]  17.02,228.47 90 top
C427  0.1uF  [0603]  25.32,218.01 180 top
C428  1.0uF  [0603]  15.75,216.41 270 top
C429  0.1uF  [0603]  12.57,221.49 180 top
C430  15pF  [0603]  11.3,227.84 0 top
C431  15pF  [0603]  11.3,222.76 0 top
C432  3.0nF  [0603]  26.54,227.84 270 top
C433  10pF  [0603]  51.18,225.3 180 top
C434  10pF  [0603]  51.18,220.22 0 top
C435  270pF  [0603]  37.85,235.46 90 top
C436  270pF  [0603]  37.85,230.38 270 top
C437  10nF  [0603]  53.72,227.84 90 top
C438  0.1uF  [0603]  45.47,213.87 270 top
C439  5.6pF  [0603]  45.67,233.55 90 top
C440  0.1uF  [0603]  39.12,195.45 90 top
C441  0.1uF  [0603]  37.21,208.15 270 top
C442  47pF  [0603]  44.2,195.45 90 top
C443  47pF  [0603]  40.39,195.45 90 top
C444  0.1uF  [0603]  41.34,213.55 180 top
C445  4.7uF  [0603-CAP]  37.21,211.33 90 top
C446  1.0uF  [0805]  43.56,201.8 90 top
C447  2.2uF  [0603]  37.21,201.8 90 top
C448  4.7uF  [0603]  51.82,195.71 0 top
C449  4.7uF  [0603]  53.72,198.63 90 top
C450  100pF  [0603]  49.28,228.47 90 top
C451  0.1uF  [0603]  48.01,228.47 90 top
C452  0.1uF  [0603]  44.2,228.47 90 top
C453  10uF  [0603]  42.93,228.47 90 top
C454  0.1uF  [0603]  51.23,218.01 180 top
C455  1.0uF  [0603]  41.66,216.41 270 top
C456  0.1uF  [0603]  38.48,221.49 180 top
C457  15pF  [0603]  37.21,227.84 0 top
C458  15pF  [0603]  37.21,222.76 0 top
C459  3.0nF  [0603]  52.45,227.84 270 top
C460  10pF  [0603]  77.09,225.3 180 top
C461  10pF  [0603]  77.09,220.22 0 top
C462  270pF  [0603]  63.75,235.46 90 top
C463  270pF  [0603]  63.75,230.38 270 top
C464  10nF  [0603]  79.63,227.84 90 top
C465  0.1uF  [0603]  71.37,213.87 270 top
C466  5.6pF  [0603]  71.58,233.55 90 top
C467  0.1uF  [0603]  65.02,195.45 90 top
C468  0.1uF  [0603]  63.12,208.15 270 top
C469  47pF  [0603]  70.1,195.45 90 top
C470  47pF  [0603]  66.29,195.45 90 top
C471  0.1uF  [0603]  67.25,213.55 180 top
C472  4.7uF  [0603-CAP]  63.12,211.33 90 top
C473  1.0uF  [0805]  69.47,201.8 90 top
C474  2.2uF  [0603]  63.12,201.8 90 top
C475  4.7uF  [0603]  77.72,195.71 0 top
C476  4.7uF  [0603]  79.63,198.63 90 top
C477  100pF  [0603]  75.18,228.47 90 top
C478  0.1uF  [0603]  73.91,228.47 90 top
C479  0.1uF  [0603]  70.1,228.47 90 top
C480  10uF  [0603]  68.83,228.47 90 top
C481  0.1uF  [0603]  77.14,218.01 180 top
C482  1.0uF  [0603]  67.56,216.41 270 top
C483  0.1uF  [0603]  64.39,221.49 180 top
C484  15pF  [0603]  63.12,227.84 0 top
C485  15pF  [0603]  63.12,222.76 0 top
C486  3.0nF  [0603]  78.36,227.84 270 top
C487  10pF  [0603]  103,225.3 180 top
C488  10pF  [0603]  103,220.22 0 top
C489  270pF  [0603]  89.66,235.46 90 top
C490  270pF  [0603]  89.66,230.38 270 top
C491  10nF  [0603]  105.54,227.84 90 top
C492  0.1uF  [0603]  97.28,213.87 270 top
C493  5.6pF  [0603]  97.49,233.55 90 top
C494  0.1uF  [0603]  90.93,195.45 90 top
C495  0.1uF  [0603]  89.03,208.15 270 top
C496  47pF  [0603]  96.01,195.45 90 top
C497  47pF  [0603]  92.2,195.45 90 top
C498  0.1uF  [0603]  93.15,213.55 180 top
C499  4.7uF  [0603-CAP]  89.03,211.33 90 top
C500  1.0uF  [0805]  95.38,201.8 90 top
C501  2.2uF  [0603]  89.03,201.8 90 top
C502  4.7uF  [0603]  103.63,195.71 0 top
C503  4.7uF  [0603]  105.54,198.63 90 top
C504  100pF  [0603]  101.09,228.47 90 top
C505  0.1uF  [0603]  99.82,228.47 90 top
C506  0.1uF  [0603]  96.01,228.47 90 top
C507  10uF  [0603]  94.74,228.47 90 top
C508  0.1uF  [0603]  103.05,218.01 180 top
C509  1.0uF  [0603]  93.47,216.41 270 top
C510  0.1uF  [0603]  90.3,221.49 180 top
C511  15pF  [0603]  89.03,227.84 0 top
C512  15pF  [0603]  89.03,222.76 0 top
C513  3.0nF  [0603]  104.27,227.84 270 top
C514  10pF  [0603]  128.91,225.3 180 top
C515  10pF  [0603]  128.91,220.22 0 top
C516  270pF  [0603]  115.57,235.46 90 top
C517  270pF  [0603]  115.57,230.38 270 top
C518  10nF  [0603]  131.44,227.84 90 top
C519  0.1uF  [0603]  123.19,213.87 270 top
C520  5.6pF  [0603]  123.39,233.55 90 top
C521  0.1uF  [0603]  116.84,195.45 90 top
C522  0.1uF  [0603]  114.94,208.15 270 top
C523  47pF  [0603]  121.92,195.45 90 top
C524  47pF  [0603]  118.11,195.45 90 top
C525  0.1uF  [0603]  119.06,213.55 180 top
C526  4.7uF  [0603-CAP]  114.94,211.33 90 top
C527  1.0uF  [0805]  121.29,201.8 90 top
C528  2.2uF  [0603]  114.94,201.8 90 top
C529  4.7uF  [0603]  129.54,195.71 0 top
C530  4.7uF  [0603]  131.44,198.63 90 top
C531  100pF  [0603]  127,228.47 90 top
C532  0.1uF  [0603]  125.73,228.47 90 top
C533  0.1uF  [0603]  121.92,228.47 90 top
C534  10uF  [0603]  120.65,228.47 90 top
C535  0.1uF  [0603]  128.96,218.01 180 top
C536  1.0uF  [0603]  119.38,216.41 270 top
C537  0.1uF  [0603]  116.2,221.49 180 top
C538  15pF  [0603]  114.94,227.84 0 top
C539  15pF  [0603]  114.94,222.76 0 top
C540  3.0nF  [0603]  130.17,227.84 270 top
D1  Yellow  [LED-0603]  22.1,9.52 180 top
D2  BAT20J  [SOD-323]  20.83,19.43 180 top
D3  RED  [LED-0603]  20.19,9.52 180 top
D4  BLUE  [LED-0603]  27.81,36.58 180 top
D5  BAT20J  [SOD-323]  46.74,19.43 180 top
D6  Yellow  [LED-0603]  48.01,9.52 180 top
D7  RED  [LED-0603]  46.1,9.52 180 top
D8  BLUE  [LED-0603]  53.72,36.58 180 top
D9  BAT20J  [SOD-323]  72.64,19.43 180 top
D10  Yellow  [LED-0603]  73.91,9.52 180 top
D11  RED  [LED-0603]  72.01,9.52 180 top
D12  BLUE  [LED-0603]  79.63,36.58 180 top
D13  BAT20J  [SOD-323]  98.55,19.43 180 top
D14  Yellow  [LED-0603]  99.82,9.52 180 top
D15  RED  [LED-0603]  97.92,9.52 180 top
D16  BLUE  [LED-0603]  105.54,36.58 180 top
D17  BAT20J  [SOD-323]  124.46,19.43 180 top
D18  Yellow  [LED-0603]  125.73,9.52 180 top
D19  RED  [LED-0603]  123.83,9.52 180 top
D20  BLUE  [LED-0603]  131.44,36.58 180 top
D21  BAT20J  [SOD-323]  20.83,79.38 180 top
D22  Yellow  [LED-0603]  22.1,69.47 180 top
D23  RED  [LED-0603]  20.19,69.47 180 top
D24  BLUE  [LED-0603]  27.81,96.52 180 top
D25  BAT20J  [SOD-323]  46.74,79.38 180 top
D26  Yellow  [LED-0603]  48.01,69.47 180 top
D27  RED  [LED-0603]  46.1,69.47 180 top
D28  BLUE  [LED-0603]  53.72,96.52 180 top
D29  BAT20J  [SOD-323]  72.64,79.38 180 top
D30  Yellow  [LED-0603]  73.91,69.47 180 top
D31  RED  [LED-0603]  72.01,69.47 180 top
D32  BLUE  [LED-0603]  79.63,96.52 180 top
D33  BAT20J  [SOD-323]  98.55,79.38 180 top
D34  Yellow  [LED-0603]  99.82,69.47 180 top
D35  RED  [LED-0603]  97.92,69.47 180 top
D36  BLUE  [LED-0603]  105.54,96.52 180 top
D37  BAT20J  [SOD-323]  124.46,79.38 180 top
D38  Yellow  [LED-0603]  125.73,69.47 180 top
D39  RED  [LED-0603]  123.83,69.47 180 top
D40  BLUE  [LED-0603]  131.44,96.52 180 top
D41  BAT20J  [SOD-323]  20.83,139.32 180 top
D42  Yellow  [LED-0603]  22.1,129.41 180 top
D43  RED  [LED-0603]  20.19,129.41 180 top
D44  BLUE  [LED-0603]  27.81,156.46 180 top
D45  BAT20J  [SOD-323]  46.74,139.32 180 top
D46  Yellow  [LED-0603]  48.01,129.41 180 top
D47  RED  [LED-0603]  46.1,129.41 180 top
D48  BLUE  [LED-0603]  53.72,156.46 180 top
D49  BAT20J  [SOD-323]  72.64,139.32 180 top
D50  Yellow  [LED-0603]  73.91,129.41 180 top
D51  RED  [LED-0603]  72.01,129.41 180 top
D52  BLUE  [LED-0603]  79.63,156.46 180 top
D53  BAT20J  [SOD-323]  98.55,139.32 180 top
D54  Yellow  [LED-0603]  99.82,129.41 180 top
D55  RED  [LED-0603]  97.92,129.41 180 top
D56  BLUE  [LED-0603]  105.54,156.46 180 top
D57  BAT20J  [SOD-323]  124.46,139.32 180 top
D58  Yellow  [LED-0603]  125.73,129.41 180 top
D59  RED  [LED-0603]  123.83,129.41 180 top
D60  BLUE  [LED-0603]  131.44,156.46 180 top
D61  BAT20J  [SOD-323]  20.83,199.26 180 top
D62  Yellow  [LED-0603]  22.1,189.36 180 top
D63  RED  [LED-0603]  20.19,189.36 180 top
D64  BLUE  [LED-0603]  27.81,216.41 180 top
D65  BAT20J  [SOD-323]  46.74,199.26 180 top
D66  Yellow  [LED-0603]  48.01,189.36 180 top
D67  RED  [LED-0603]  46.1,189.36 180 top
D68  BLUE  [LED-0603]  53.72,216.41 180 top
D69  BAT20J  [SOD-323]  72.64,199.26 180 top
D70  Yellow  [LED-0603]  73.91,189.36 180 top
D71  RED  [LED-0603]  72.01,189.36 180 top
D72  BLUE  [LED-0603]  79.63,216.41 180 top
D73  BAT20J  [SOD-323]  98.55,199.26 180 top
D74  Yellow  [LED-0603]  99.82,189.36 180 top
D75  RED  [LED-0603]  97.92,189.36 180 top
D76  BLUE  [LED-0603]  105.54,216.41 180 top
D77  BAT20J  [SOD-323]  124.46,199.26 180 top
D78  Yellow  [LED-0603]  125.73,189.36 180 top
D79  RED  [LED-0603]  123.83,189.36 180 top
D80  BLUE  [LED-0603]  131.44,216.41 180 top
E1  ANTENNA  [TRACE_ANTENNA_2.4GHZ_25.7MM_TUNED]  18.03,58.8 0 top
E2  ANTENNA  [TRACE_ANTENNA_2.4GHZ_25.7MM_TUNED]  43.94,58.8 0 top
E3  ANTENNA  [TRACE_ANTENNA_2.4GHZ_25.7MM_TUNED]  69.85,58.8 0 top
E4  ANTENNA  [TRACE_ANTENNA_2.4GHZ_25.7MM_TUNED]  95.76,58.8 0 top
E5  ANTENNA  [TRACE_ANTENNA_2.4GHZ_25.7MM_TUNED]  121.67,58.8 0 top
E6  ANTENNA  [TRACE_ANTENNA_2.4GHZ_25.7MM_TUNED]  18.03,118.75 0 top
E7  ANTENNA  [TRACE_ANTENNA_2.4GHZ_25.7MM_TUNED]  43.94,118.75 0 top
E8  ANTENNA  [TRACE_ANTENNA_2.4GHZ_25.7MM_TUNED]  69.85,118.75 0 top
E9  ANTENNA  [TRACE_ANTENNA_2.4GHZ_25.7MM_TUNED]  95.76,118.75 0 top
E10  ANTENNA  [TRACE_ANTENNA_2.4GHZ_25.7MM_TUNED]  121.67,118.75 0 top
E11  ANTENNA  [TRACE_ANTENNA_2.4GHZ_25.7MM_TUNED]  18.03,178.69 0 top
E12  ANTENNA  [TRACE_ANTENNA_2.4GHZ_25.7MM_TUNED]  43.94,178.69 0 top
E13  ANTENNA  [TRACE_ANTENNA_2.4GHZ_25.7MM_TUNED]  69.85,178.69 0 top
E14  ANTENNA  [TRACE_ANTENNA_2.4GHZ_25.7MM_TUNED]  95.76,178.69 0 top
E15  ANTENNA  [TRACE_ANTENNA_2.4GHZ_25.7MM_TUNED]  121.67,178.69 0 top
E16  ANTENNA  [TRACE_ANTENNA_2.4GHZ_25.7MM_TUNED]  18.03,238.63 0 top
E17  ANTENNA  [TRACE_ANTENNA_2.4GHZ_25.7MM_TUNED]  43.94,238.63 0 top
E18  ANTENNA  [TRACE_ANTENNA_2.4GHZ_25.7MM_TUNED]  69.85,238.63 0 top
E19  ANTENNA  [TRACE_ANTENNA_2.4GHZ_25.7MM_TUNED]  95.76,238.63 0 top
E20  ANTENNA  [TRACE_ANTENNA_2.4GHZ_25.7MM_TUNED]  121.67,238.63 0 top
E$1  [FIDUCIAL-1.5X3]  4.57,11.43 0 top
E$7  [FIDUCIAL-1X2]  137.54,242.06 180 top
E$8  [FIDUCIAL-1X2]  137.54,10.41 0 top
F1  500mA  [PTC-1206]  11.3,16.89 90 top
F2  500mA  [PTC-1206]  37.21,16.89 90 top
F3  500mA  [PTC-1206]  63.12,16.89 90 top
F4  500mA  [PTC-1206]  89.03,16.89 90 top
F5  500mA  [PTC-1206]  114.94,16.89 90 top
F6  500mA  [PTC-1206]  11.3,76.83 90 top
F7  500mA  [PTC-1206]  37.21,76.83 90 top
F8  500mA  [PTC-1206]  63.12,76.83 90 top
F9  500mA  [PTC-1206]  89.03,76.83 90 top
F10  500mA  [PTC-1206]  114.94,76.83 90 top
F11  500mA  [PTC-1206]  11.3,136.78 90 top
F12  500mA  [PTC-1206]  37.21,136.78 90 top
F13  500mA  [PTC-1206]  63.12,136.78 90 top
F14  500mA  [PTC-1206]  89.03,136.78 90 top
F15  500mA  [PTC-1206]  114.94,136.78 90 top
F16  500mA  [PTC-1206]  11.3,196.72 90 top
F17  500mA  [PTC-1206]  37.21,196.72 90 top
F18  500mA  [PTC-1206]  63.12,196.72 90 top
F19  500mA  [PTC-1206]  89.03,196.72 90 top
F20  500mA  [PTC-1206]  114.94,196.72 90 top
FD1  FIDUCIALUFIDUCIAL  [MICRO-FIDUCIAL]  9.96,10.85 0 top
FD2  FIDUCIALUFIDUCIAL  [MICRO-FIDUCIAL]  28.45,55.63 0 top
FD3  FIDUCIALUFIDUCIAL  [MICRO-FIDUCIAL]  35.86,10.85 0 top
FD4  FIDUCIALUFIDUCIAL  [MICRO-FIDUCIAL]  54.36,55.63 0 top
FD5  FIDUCIALUFIDUCIAL  [MICRO-FIDUCIAL]  61.77,10.85 0 top
FD6  FIDUCIALUFIDUCIAL  [MICRO-FIDUCIAL]  80.26,55.63 0 top
FD7  FIDUCIALUFIDUCIAL  [MICRO-FIDUCIAL]  87.68,10.85 0 top
FD8  FIDUCIALUFIDUCIAL  [MICRO-FIDUCIAL]  106.17,55.63 0 top
FD9  FIDUCIALUFIDUCIAL  [MICRO-FIDUCIAL]  113.59,10.85 0 top
FD10  FIDUCIALUFIDUCIAL  [MICRO-FIDUCIAL]  132.08,55.63 0 top
FD11  FIDUCIALUFIDUCIAL  [MICRO-FIDUCIAL]  9.96,70.79 0 top
FD12  FIDUCIALUFIDUCIAL  [MICRO-FIDUCIAL]  28.45,115.57 0 top
FD13  FIDUCIALUFIDUCIAL  [MICRO-FIDUCIAL]  35.86,70.79 0 top
FD14  FIDUCIALUFIDUCIAL  [MICRO-FIDUCIAL]  54.36,115.57 0 top
FD15  FIDUCIALUFIDUCIAL  [MICRO-FIDUCIAL]  61.77,70.79 0 top
FD16  FIDUCIALUFIDUCIAL  [MICRO-FIDUCIAL]  80.26,115.57 0 top
FD17  FIDUCIALUFIDUCIAL  [MICRO-FIDUCIAL]  87.68,70.79 0 top
FD18  FIDUCIALUFIDUCIAL  [MICRO-FIDUCIAL]  106.17,115.57 0 top
FD19  FIDUCIALUFIDUCIAL  [MICRO-FIDUCIAL]  113.59,70.79 0 top
FD20  FIDUCIALUFIDUCIAL  [MICRO-FIDUCIAL]  132.08,115.57 0 top
FD21  FIDUCIALUFIDUCIAL  [MICRO-FIDUCIAL]  9.96,130.73 0 top
FD22  FIDUCIALUFIDUCIAL  [MICRO-FIDUCIAL]  28.45,175.51 0 top
FD23  FIDUCIALUFIDUCIAL  [MICRO-FIDUCIAL]  35.86,130.73 0 top
FD24  FIDUCIALUFIDUCIAL  [MICRO-FIDUCIAL]  54.36,175.51 0 top
FD25  FIDUCIALUFIDUCIAL  [MICRO-FIDUCIAL]  61.77,130.73 0 top
FD26  FIDUCIALUFIDUCIAL  [MICRO-FIDUCIAL]  80.26,175.51 0 top
FD27  FIDUCIALUFIDUCIAL  [MICRO-FIDUCIAL]  87.68,130.73 0 top
FD28  FIDUCIALUFIDUCIAL  [MICRO-FIDUCIAL]  106.17,175.51 0 top
FD29  FIDUCIALUFIDUCIAL  [MICRO-FIDUCIAL]  113.59,130.73 0 top
FD30  FIDUCIALUFIDUCIAL  [MICRO-FIDUCIAL]  132.08,175.51 0 top
FD31  FIDUCIALUFIDUCIAL  [MICRO-FIDUCIAL]  9.96,190.68 0 top
FD32  FIDUCIALUFIDUCIAL  [MICRO-FIDUCIAL]  28.45,235.46 0 top
FD33  FIDUCIALUFIDUCIAL  [MICRO-FIDUCIAL]  35.86,190.68 0 top
FD34  FIDUCIALUFIDUCIAL  [MICRO-FIDUCIAL]  54.36,235.46 0 top
FD35  FIDUCIALUFIDUCIAL  [MICRO-FIDUCIAL]  61.77,190.68 0 top
FD36  FIDUCIALUFIDUCIAL  [MICRO-FIDUCIAL]  80.26,235.46 0 top
FD37  FIDUCIALUFIDUCIAL  [MICRO-FIDUCIAL]  87.68,190.68 0 top
FD38  FIDUCIALUFIDUCIAL  [MICRO-FIDUCIAL]  106.17,235.46 0 top
FD39  FIDUCIALUFIDUCIAL  [MICRO-FIDUCIAL]  113.59,190.68 0 top
FD40  FIDUCIALUFIDUCIAL  [MICRO-FIDUCIAL]  132.08,235.46 0 top
J1  [1X20_NOSILK]  8.13,8.64 90 top
J2  [1X20_NOSILK]  30.99,8.64 90 top
J3  [1X20_NOSILK]  34.04,8.64 90 top
J4  [1X20_NOSILK]  56.9,8.64 90 top
J5  [1X20_NOSILK]  59.94,8.64 90 top
J6  [1X20_NOSILK]  82.8,8.64 90 top
J7  [1X20_NOSILK]  85.85,8.64 90 top
J8  [1X20_NOSILK]  108.71,8.64 90 top
J9  [1X20_NOSILK]  111.76,8.64 90 top
J10  [1X20_NOSILK]  134.62,8.64 90 top
J11  [1X20_NOSILK]  8.13,68.58 90 top
J12  [1X20_NOSILK]  30.99,68.58 90 top
J13  [1X20_NOSILK]  34.04,68.58 90 top
J14  [1X20_NOSILK]  56.9,68.58 90 top
J15  [1X20_NOSILK]  59.94,68.58 90 top
J16  [1X20_NOSILK]  82.8,68.58 90 top
J17  [1X20_NOSILK]  85.85,68.58 90 top
J18  [1X20_NOSILK]  108.71,68.58 90 top
J19  [1X20_NOSILK]  111.76,68.58 90 top
J20  [1X20_NOSILK]  134.62,68.58 90 top
J21  [1X20_NOSILK]  8.13,128.52 90 top
J22  [1X20_NOSILK]  30.99,128.52 90 top
J23  [1X20_NOSILK]  34.04,128.52 90 top
J24  [1X20_NOSILK]  56.9,128.52 90 top
J25  [1X20_NOSILK]  59.94,128.52 90 top
J26  [1X20_NOSILK]  82.8,128.52 90 top
J27  [1X20_NOSILK]  85.85,128.52 90 top
J28  [1X20_NOSILK]  108.71,128.52 90 top
J29  [1X20_NOSILK]  111.76,128.52 90 top
J30  [1X20_NOSILK]  134.62,128.52 90 top
J31  [1X20_NOSILK]  8.13,188.47 90 top
J32  [1X20_NOSILK]  30.99,188.47 90 top
J33  [1X20_NOSILK]  34.04,188.47 90 top
J34  [1X20_NOSILK]  56.9,188.47 90 top
J35  [1X20_NOSILK]  59.94,188.47 90 top
J36  [1X20_NOSILK]  82.8,188.47 90 top
J37  [1X20_NOSILK]  85.85,188.47 90 top
J38  [1X20_NOSILK]  108.71,188.47 90 top
J39  [1X20_NOSILK]  111.76,188.47 90 top
J40  [1X20_NOSILK]  134.62,188.47 90 top
JP1  [USB-B-MICRO-SMD_V03]  40.39,9.33 90 top
JP2  LiPo  [JST-2-PTH]  25.91,13.34 180 top
JP3  LiPo  [JST-2-PTH]  51.82,13.34 180 top
JP4  [USB-B-MICRO-SMD_V03]  66.29,9.33 90 top
JP5  LiPo  [JST-2-PTH]  77.72,13.34 180 top
JP6  [USB-B-MICRO-SMD_V03]  92.2,9.33 90 top
JP7  LiPo  [JST-2-PTH]  103.63,13.34 180 top
JP8  [USB-B-MICRO-SMD_V03]  118.11,9.33 90 top
JP9  LiPo  [JST-2-PTH]  129.54,13.34 180 top
JP10  [USB-B-MICRO-SMD_V03]  14.48,69.28 90 top
JP11  LiPo  [JST-2-PTH]  25.91,73.28 180 top
JP12  [USB-B-MICRO-SMD_V03]  40.39,69.28 90 top
JP13  LiPo  [JST-2-PTH]  51.82,73.28 180 top
JP14  [USB-B-MICRO-SMD_V03]  66.29,69.28 90 top
JP15  [USB-B-MICRO-SMD_V03]  14.48,9.33 90 top
JP16  LiPo  [JST-2-PTH]  77.72,73.28 180 top
JP17  [USB-B-MICRO-SMD_V03]  92.2,69.28 90 top
JP18  LiPo  [JST-2-PTH]  103.63,73.28 180 top
JP19  [USB-B-MICRO-SMD_V03]  118.11,69.28 90 top
JP20  LiPo  [JST-2-PTH]  129.54,73.28 180 top
JP21  [USB-B-MICRO-SMD_V03]  14.48,129.22 90 top
JP22  LiPo  [JST-2-PTH]  25.91,133.22 180 top
JP23  [USB-B-MICRO-SMD_V03]  40.39,129.22 90 top
JP24  LiPo  [JST-2-PTH]  51.82,133.22 180 top
JP25  [USB-B-MICRO-SMD_V03]  66.29,129.22 90 top
JP26  LiPo  [JST-2-PTH]  77.72,133.22 180 top
JP27  [USB-B-MICRO-SMD_V03]  92.2,129.22 90 top
JP28  LiPo  [JST-2-PTH]  103.63,133.22 180 top
JP29  [USB-B-MICRO-SMD_V03]  118.11,129.22 90 top
JP30  LiPo  [JST-2-PTH]  129.54,133.22 180 top
JP31  [USB-B-MICRO-SMD_V03]  14.48,189.17 90 top
JP32  LiPo  [JST-2-PTH]  25.91,193.17 180 top
JP33  [USB-B-MICRO-SMD_V03]  40.39,189.17 90 top
JP34  LiPo  [JST-2-PTH]  51.82,193.17 180 top
JP35  [USB-B-MICRO-SMD_V03]  66.29,189.17 90 top
JP36  LiPo  [JST-2-PTH]  77.72,193.17 180 top
JP37  [USB-B-MICRO-SMD_V03]  92.2,189.17 90 top
JP38  LiPo  [JST-2-PTH]  103.63,193.17 180 top
JP39  [USB-B-MICRO-SMD_V03]  118.11,189.17 90 top
JP40  LiPo  [JST-2-PTH]  129.54,193.17 180 top
L1  DNP  [0603]  18.92,51.18 180 top
L2  DNP  [0603]  18.29,56.26 180 top
L3  DNP  [0603]  44.83,51.18 180 top
L4  DNP  [0603]  44.2,56.26 180 top
L5  DNP  [0603]  70.74,51.18 180 top
L6  DNP  [0603]  70.1,56.26 180 top
L7  DNP  [0603]  96.65,51.18 180 top
L8  DNP  [0603]  96.01,56.26 180 top
L9  DNP  [0603]  122.56,51.18 180 top
L10  DNP  [0603]  121.92,56.26 180 top
L11  DNP  [0603]  18.92,111.12 180 top
L12  DNP  [0603]  18.29,116.2 180 top
L13  DNP  [0603]  44.83,111.12 180 top
L14  DNP  [0603]  44.2,116.2 180 top
L15  DNP  [0603]  70.74,111.12 180 top
L16  DNP  [0603]  70.1,116.2 180 top
L17  DNP  [0603]  96.65,111.12 180 top
L18  DNP  [0603]  96.01,116.2 180 top
L19  DNP  [0603]  122.56,111.12 180 top
L20  DNP  [0603]  121.92,116.2 180 top
L21  DNP  [0603]  18.92,171.07 180 top
L22  DNP  [0603]  18.29,176.15 180 top
L23  DNP  [0603]  44.83,171.07 180 top
L24  DNP  [0603]  44.2,176.15 180 top
L25  DNP  [0603]  70.74,171.07 180 top
L26  DNP  [0603]  70.1,176.15 180 top
L27  DNP  [0603]  96.65,171.07 180 top
L28  DNP  [0603]  96.01,176.15 180 top
L29  DNP  [0603]  122.56,171.07 180 top
L30  DNP  [0603]  121.92,176.15 180 top
L31  DNP  [0603]  18.92,231.01 180 top
L32  DNP  [0603]  18.29,236.09 180 top
L33  DNP  [0603]  44.83,231.01 180 top
L34  DNP  [0603]  44.2,236.09 180 top
L35  DNP  [0603]  70.74,231.01 180 top
L36  DNP  [0603]  70.1,236.09 180 top
L37  DNP  [0603]  96.65,231.01 180 top
L38  DNP  [0603]  96.01,236.09 180 top
L39  DNP  [0603]  122.56,231.01 180 top
L40  DNP  [0603]  121.92,236.09 180 top
LOGO1  SFE_LOGO_NAME.2_INCH  [SFE_LOGO_NAME_.2]  8.64,59.82 0 top
LOGO2  OSHW-LOGOMINI  [OSHW-LOGO-MINI]  13.08,35.94 0 top
LOGO3  SFE_LOGO_NAME.2_INCH  [SFE_LOGO_NAME_.2]  30.61,60.45 0 bottom
LOGO4  SFE_LOGO_NAME.2_INCH  [SFE_LOGO_NAME_.2]  34.54,59.82 0 top
LOGO5  OSHW-LOGOMINI  [OSHW-LOGO-MINI]  38.99,35.94 0 top
LOGO6  SFE_LOGO_NAME.2_INCH  [SFE_LOGO_NAME_.2]  56.51,60.45 0 bottom
LOGO7  SFE_LOGO_NAME.2_INCH  [SFE_LOGO_NAME_.2]  60.45,59.82 0 top
LOGO8  OSHW-LOGOMINI  [OSHW-LOGO-MINI]  64.9,35.94 0 top
LOGO9  SFE_LOGO_NAME.2_INCH  [SFE_LOGO_NAME_.2]  82.42,60.45 0 bottom
LOGO10  SFE_LOGO_NAME.2_INCH  [SFE_LOGO_NAME_.2]  86.36,59.82 0 top
LOGO11  OSHW-LOGOMINI  [OSHW-LOGO-MINI]  90.81,35.94 0 top
LOGO12  SFE_LOGO_NAME.2_INCH  [SFE_LOGO_NAME_.2]  108.33,60.45 0 bottom
LOGO13  SFE_LOGO_NAME.2_INCH  [SFE_LOGO_NAME_.2]  112.27,59.82 0 top
LOGO14  OSHW-LOGOMINI  [OSHW-LOGO-MINI]  116.71,35.94 0 top
LOGO15  SFE_LOGO_NAME.2_INCH  [SFE_LOGO_NAME_.2]  134.24,60.45 0 bottom
LOGO16  SFE_LOGO_NAME.2_INCH  [SFE_LOGO_NAME_.2]  8.64,119.76 0 top
LOGO17  OSHW-LOGOMINI  [OSHW-LOGO-MINI]  13.08,95.89 0 top
LOGO18  SFE_LOGO_NAME.2_INCH  [SFE_LOGO_NAME_.2]  30.61,120.4 0 bottom
LOGO19  SFE_LOGO_NAME.2_INCH  [SFE_LOGO_NAME_.2]  34.54,119.76 0 top
LOGO20  OSHW-LOGOMINI  [OSHW-LOGO-MINI]  38.99,95.89 0 top
LOGO21  SFE_LOGO_NAME.2_INCH  [SFE_LOGO_NAME_.2]  56.51,120.4 0 bottom
LOGO22  SFE_LOGO_NAME.2_INCH  [SFE_LOGO_NAME_.2]  60.45,119.76 0 top
LOGO23  OSHW-LOGOMINI  [OSHW-LOGO-MINI]  64.9,95.89 0 top
LOGO24  SFE_LOGO_NAME.2_INCH  [SFE_LOGO_NAME_.2]  82.42,120.4 0 bottom
LOGO25  SFE_LOGO_NAME.2_INCH  [SFE_LOGO_NAME_.2]  86.36,119.76 0 top
LOGO26  OSHW-LOGOMINI  [OSHW-LOGO-MINI]  90.81,95.89 0 top
LOGO27  SFE_LOGO_NAME.2_INCH  [SFE_LOGO_NAME_.2]  108.33,120.4 0 bottom
LOGO28  SFE_LOGO_NAME.2_INCH  [SFE_LOGO_NAME_.2]  112.27,119.76 0 top
LOGO29  OSHW-LOGOMINI  [OSHW-LOGO-MINI]  116.71,95.89 0 top
LOGO30  SFE_LOGO_NAME.2_INCH  [SFE_LOGO_NAME_.2]  134.24,120.4 0 bottom
LOGO31  SFE_LOGO_NAME.2_INCH  [SFE_LOGO_NAME_.2]  8.64,179.7 0 top
LOGO32  OSHW-LOGOMINI  [OSHW-LOGO-MINI]  13.08,155.83 0 top
LOGO33  SFE_LOGO_NAME.2_INCH  [SFE_LOGO_NAME_.2]  30.61,180.34 0 bottom
LOGO34  SFE_LOGO_NAME.2_INCH  [SFE_LOGO_NAME_.2]  34.54,179.7 0 top
LOGO35  OSHW-LOGOMINI  [OSHW-LOGO-MINI]  38.99,155.83 0 top
LOGO36  SFE_LOGO_NAME.2_INCH  [SFE_LOGO_NAME_.2]  56.51,180.34 0 bottom
LOGO37  SFE_LOGO_NAME.2_INCH  [SFE_LOGO_NAME_.2]  60.45,179.7 0 top
LOGO38  OSHW-LOGOMINI  [OSHW-LOGO-MINI]  64.9,155.83 0 top
LOGO39  SFE_LOGO_NAME.2_INCH  [SFE_LOGO_NAME_.2]  82.42,180.34 0 bottom
LOGO40  SFE_LOGO_NAME.2_INCH  [SFE_LOGO_NAME_.2]  86.36,179.7 0 top
LOGO41  OSHW-LOGOMINI  [OSHW-LOGO-MINI]  90.81,155.83 0 top
LOGO42  SFE_LOGO_NAME.2_INCH  [SFE_LOGO_NAME_.2]  108.33,180.34 0 bottom
LOGO43  SFE_LOGO_NAME.2_INCH  [SFE_LOGO_NAME_.2]  112.27,179.7 0 top
LOGO44  OSHW-LOGOMINI  [OSHW-LOGO-MINI]  116.71,155.83 0 top
LOGO45  SFE_LOGO_NAME.2_INCH  [SFE_LOGO_NAME_.2]  134.24,180.34 0 bottom
LOGO46  SFE_LOGO_NAME.2_INCH  [SFE_LOGO_NAME_.2]  8.64,239.65 0 top
LOGO47  OSHW-LOGOMINI  [OSHW-LOGO-MINI]  13.08,215.77 0 top
LOGO48  SFE_LOGO_NAME.2_INCH  [SFE_LOGO_NAME_.2]  30.61,240.28 0 bottom
LOGO49  SFE_LOGO_NAME.2_INCH  [SFE_LOGO_NAME_.2]  34.54,239.65 0 top
LOGO50  OSHW-LOGOMINI  [OSHW-LOGO-MINI]  38.99,215.77 0 top
LOGO51  SFE_LOGO_NAME.2_INCH  [SFE_LOGO_NAME_.2]  56.51,240.28 0 bottom
LOGO52  SFE_LOGO_NAME.2_INCH  [SFE_LOGO_NAME_.2]  60.45,239.65 0 top
LOGO53  OSHW-LOGOMINI  [OSHW-LOGO-MINI]  64.9,215.77 0 top
LOGO54  SFE_LOGO_NAME.2_INCH  [SFE_LOGO_NAME_.2]  82.42,240.28 0 bottom
LOGO55  SFE_LOGO_NAME.2_INCH  [SFE_LOGO_NAME_.2]  86.36,239.65 0 top
LOGO56  OSHW-LOGOMINI  [OSHW-LOGO-MINI]  90.81,215.77 0 top
LOGO57  SFE_LOGO_NAME.2_INCH  [SFE_LOGO_NAME_.2]  108.33,240.28 0 bottom
LOGO58  SFE_LOGO_NAME.2_INCH  [SFE_LOGO_NAME_.2]  112.27,239.65 0 top
LOGO59  OSHW-LOGOMINI  [OSHW-LOGO-MINI]  116.71,215.77 0 top
LOGO60  SFE_LOGO_NAME.2_INCH  [SFE_LOGO_NAME_.2]  134.24,240.28 0 bottom
Q1  2.5A/30V  [SOT23-3]  20.19,21.97 270 top
Q2  MBT3904DW1T1  [SC70-6]  23.37,26.42 180 top
Q3  2.5A/30V  [SOT23-3]  46.1,21.97 270 top
Q4  MBT3904DW1T1  [SC70-6]  49.28,26.42 180 top
Q5  2.5A/30V  [SOT23-3]  72.01,21.97 270 top
Q6  MBT3904DW1T1  [SC70-6]  75.18,26.42 180 top
Q7  2.5A/30V  [SOT23-3]  97.92,21.97 270 top
Q8  MBT3904DW1T1  [SC70-6]  101.09,26.42 180 top
Q9  2.5A/30V  [SOT23-3]  123.83,21.97 270 top
Q10  MBT3904DW1T1  [SC70-6]  127,26.42 180 top
Q11  2.5A/30V  [SOT23-3]  20.19,81.92 270 top
Q12  MBT3904DW1T1  [SC70-6]  23.37,86.36 180 top
Q13  2.5A/30V  [SOT23-3]  46.1,81.92 270 top
Q14  MBT3904DW1T1  [SC70-6]  49.28,86.36 180 top
Q15  2.5A/30V  [SOT23-3]  72.01,81.92 270 top
Q16  MBT3904DW1T1  [SC70-6]  75.18,86.36 180 top
Q17  2.5A/30V  [SOT23-3]  97.92,81.92 270 top
Q18  MBT3904DW1T1  [SC70-6]  101.09,86.36 180 top
Q19  2.5A/30V  [SOT23-3]  123.83,81.92 270 top
Q20  MBT3904DW1T1  [SC70-6]  127,86.36 180 top
Q21  2.5A/30V  [SOT23-3]  20.19,141.86 270 top
Q22  MBT3904DW1T1  [SC70-6]  23.37,146.3 180 top
Q23  2.5A/30V  [SOT23-3]  46.1,141.86 270 top
Q24  MBT3904DW1T1  [SC70-6]  49.28,146.3 180 top
Q25  2.5A/30V  [SOT23-3]  72.01,141.86 270 top
Q26  MBT3904DW1T1  [SC70-6]  75.18,146.3 180 top
Q27  2.5A/30V  [SOT23-3]  97.92,141.86 270 top
Q28  MBT3904DW1T1  [SC70-6]  101.09,146.3 180 top
Q29  2.5A/30V  [SOT23-3]  123.83,141.86 270 top
Q30  MBT3904DW1T1  [SC70-6]  127,146.3 180 top
Q31  2.5A/30V  [SOT23-3]  20.19,201.8 270 top
Q32  MBT3904DW1T1  [SC70-6]  23.37,206.25 180 top
Q33  2.5A/30V  [SOT23-3]  46.1,201.8 270 top
Q34  MBT3904DW1T1  [SC70-6]  49.28,206.25 180 top
Q35  2.5A/30V  [SOT23-3]  72.01,201.8 270 top
Q36  MBT3904DW1T1  [SC70-6]  75.18,206.25 180 top
Q37  2.5A/30V  [SOT23-3]  97.92,201.8 270 top
Q38  MBT3904DW1T1  [SC70-6]  101.09,206.25 180 top
Q39  2.5A/30V  [SOT23-3]  123.83,201.8 270 top
Q40  MBT3904DW1T1  [SC70-6]  127,206.25 180 top
R1  10k  [0603]  14.48,49.28 0 top
R2  20k  [0603]  25.27,48.01 90 top
R3  1K  [0603]  22.1,13.34 270 top
R4  1K  [0603]  20.19,13.34 270 top
R5  DNP  [1/6W-RES]  25.27,21.97 0 top
R6  2.0k  [0603]  25.27,21.97 0 top
R7  10k  [0603]  20.83,17.53 180 top
R8  330  [0603]  27.18,32.77 90 top
R9  10k  [0603]  27.18,53.09 270 top
R10  10k  [0603]  40.39,49.28 0 top
R11  20k  [0603]  51.18,48.01 90 top
R12  27  [0603]  41.66,15.62 90 top
R13  27  [0603]  15.75,15.62 90 top
R14  27  [0603]  17.02,15.62 90 top
R15  27  [0603]  42.93,15.62 90 top
R16  10k  [0603]  46.74,17.53 180 top
R17  10k  [0603]  25.91,26.42 270 top
R18  10k  [0603]  20.83,26.42 90 top
R19  1K  [0603]  48.01,13.34 270 top
R20  2.0k  [0603]  51.18,21.97 0 top
R21  DNP  [1/6W-RES]  51.18,21.97 0 top
R22  10k  [0603]  51.82,26.42 270 top
R23  10k  [0603]  46.74,26.42 90 top
R24  1K  [0603]  46.1,13.34 270 top
R25  330  [0603]  53.09,32.77 90 top
R26  10k  [0603]  53.09,53.09 270 top
R27  10k  [0603]  66.29,49.28 0 top
R28  20k  [0603]  77.09,48.01 90 top
R29  27  [0603]  67.56,15.62 90 top
R30  27  [0603]  68.83,15.62 90 top
R31  10k  [0603]  72.64,17.53 180 top
R32  1K  [0603]  73.91,13.34 270 top
R33  2.0k  [0603]  77.09,21.97 0 top
R34  DNP  [1/6W-RES]  77.09,21.97 0 top
R35  10k  [0603]  77.72,26.42 270 top
R36  10k  [0603]  72.64,26.42 90 top
R37  1K  [0603]  72.01,13.34 270 top
R38  330  [0603]  78.99,32.77 90 top
R39  10k  [0603]  78.99,53.09 270 top
R40  10k  [0603]  92.2,49.28 0 top
R41  20k  [0603]  103,48.01 90 top
R42  27  [0603]  93.47,15.62 90 top
R43  27  [0603]  94.74,15.62 90 top
R44  10k  [0603]  98.55,17.53 180 top
R45  1K  [0603]  99.82,13.34 270 top
R46  2.0k  [0603]  103,21.97 0 top
R47  DNP  [1/6W-RES]  103,21.97 0 top
R48  10k  [0603]  103.63,26.42 270 top
R49  10k  [0603]  98.55,26.42 90 top
R50  1K  [0603]  97.92,13.34 270 top
R51  330  [0603]  104.9,32.77 90 top
R52  10k  [0603]  104.9,53.09 270 top
R53  10k  [0603]  118.11,49.28 0 top
R54  20k  [0603]  128.91,48.01 90 top
R55  27  [0603]  119.38,15.62 90 top
R56  27  [0603]  120.65,15.62 90 top
R57  10k  [0603]  124.46,17.53 180 top
R58  1K  [0603]  125.73,13.34 270 top
R59  2.0k  [0603]  128.91,21.97 0 top
R60  DNP  [1/6W-RES]  128.91,21.97 0 top
R61  10k  [0603]  129.54,26.42 270 top
R62  10k  [0603]  124.46,26.42 90 top
R63  1K  [0603]  123.83,13.34 270 top
R64  330  [0603]  130.81,32.77 90 top
R65  10k  [0603]  130.81,53.09 270 top
R66  10k  [0603]  14.48,109.22 0 top
R67  20k  [0603]  25.27,107.95 90 top
R68  27  [0603]  15.75,75.56 90 top
R69  27  [0603]  17.02,75.56 90 top
R70  10k  [0603]  20.83,77.47 180 top
R71  1K  [0603]  22.1,73.28 270 top
R72  2.0k  [0603]  25.27,81.92 0 top
R73  DNP  [1/6W-RES]  25.27,81.92 0 top
R74  10k  [0603]  25.91,86.36 270 top
R75  10k  [0603]  20.83,86.36 90 top
R76  1K  [0603]  20.19,73.28 270 top
R77  330  [0603]  27.18,92.71 90 top
R78  10k  [0603]  27.18,113.03 270 top
R79  10k  [0603]  40.39,109.22 0 top
R80  20k  [0603]  51.18,107.95 90 top
R81  27  [0603]  41.66,75.56 90 top
R82  27  [0603]  42.93,75.56 90 top
R83  10k  [0603]  46.74,77.47 180 top
R84  1K  [0603]  48.01,73.28 270 top
R85  2.0k  [0603]  51.18,81.92 0 top
R86  DNP  [1/6W-RES]  51.18,81.92 0 top
R87  10k  [0603]  51.82,86.36 270 top
R88  10k  [0603]  46.74,86.36 90 top
R89  1K  [0603]  46.1,73.28 270 top
R90  330  [0603]  53.09,92.71 90 top
R91  10k  [0603]  53.09,113.03 270 top
R92  10k  [0603]  66.29,109.22 0 top
R93  20k  [0603]  77.09,107.95 90 top
R94  27  [0603]  67.56,75.56 90 top
R95  27  [0603]  68.83,75.56 90 top
R96  10k  [0603]  72.64,77.47 180 top
R97  1K  [0603]  73.91,73.28 270 top
R98  2.0k  [0603]  77.09,81.92 0 top
R99  DNP  [1/6W-RES]  77.09,81.92 0 top
R100  10k  [0603]  77.72,86.36 270 top
R101  10k  [0603]  72.64,86.36 90 top
R102  1K  [0603]  72.01,73.28 270 top
R103  330  [0603]  78.99,92.71 90 top
R104  10k  [0603]  78.99,113.03 270 top
R105  10k  [0603]  92.2,109.22 0 top
R106  20k  [0603]  103,107.95 90 top
R107  27  [0603]  93.47,75.56 90 top
R108  27  [0603]  94.74,75.56 90 top
R109  10k  [0603]  98.55,77.47 180 top
R110  1K  [0603]  99.82,73.28 270 top
R111  2.0k  [0603]  103,81.92 0 top
R112  DNP  [1/6W-RES]  103,81.92 0 top
R113  10k  [0603]  103.63,86.36 270 top
R114  10k  [0603]  98.55,86.36 90 top
R115  1K  [0603]  97.92,73.28 270 top
R116  330  [0603]  104.9,92.71 90 top
R117  10k  [0603]  104.9,113.03 270 top
R118  10k  [0603]  118.11,109.22 0 top
R119  20k  [0603]  128.91,107.95 90 top
R120  27  [0603]  119.38,75.56 90 top
R121  27  [0603]  120.65,75.56 90 top
R122  10k  [0603]  124.46,77.47 180 top
R123  1K  [0603]  125.73,73.28 270 top
R124  2.0k  [0603]  128.91,81.92 0 top
R125  DNP  [1/6W-RES]  128.91,81.92 0 top
R126  10k  [0603]  129.54,86.36 270 top
R127  10k  [0603]  124.46,86.36 90 top
R128  1K  [0603]  123.83,73.28 270 top
R129  330  [0603]  130.81,92.71 90 top
R130  10k  [0603]  130.81,113.03 270 top